# Altium PCB VALVE_MODULE_20221227OK .PcbDoc (part 1 of 4)
Units mm, origin at the board's own origin, x right, y up, seen from the top; angles counter-clockwise.
Board outline 260.15 x 142.01 mm, 2 copper layers (Top Layer, Bottom Layer); 455 components, 212 nets, 1302 pads, 385 vias.
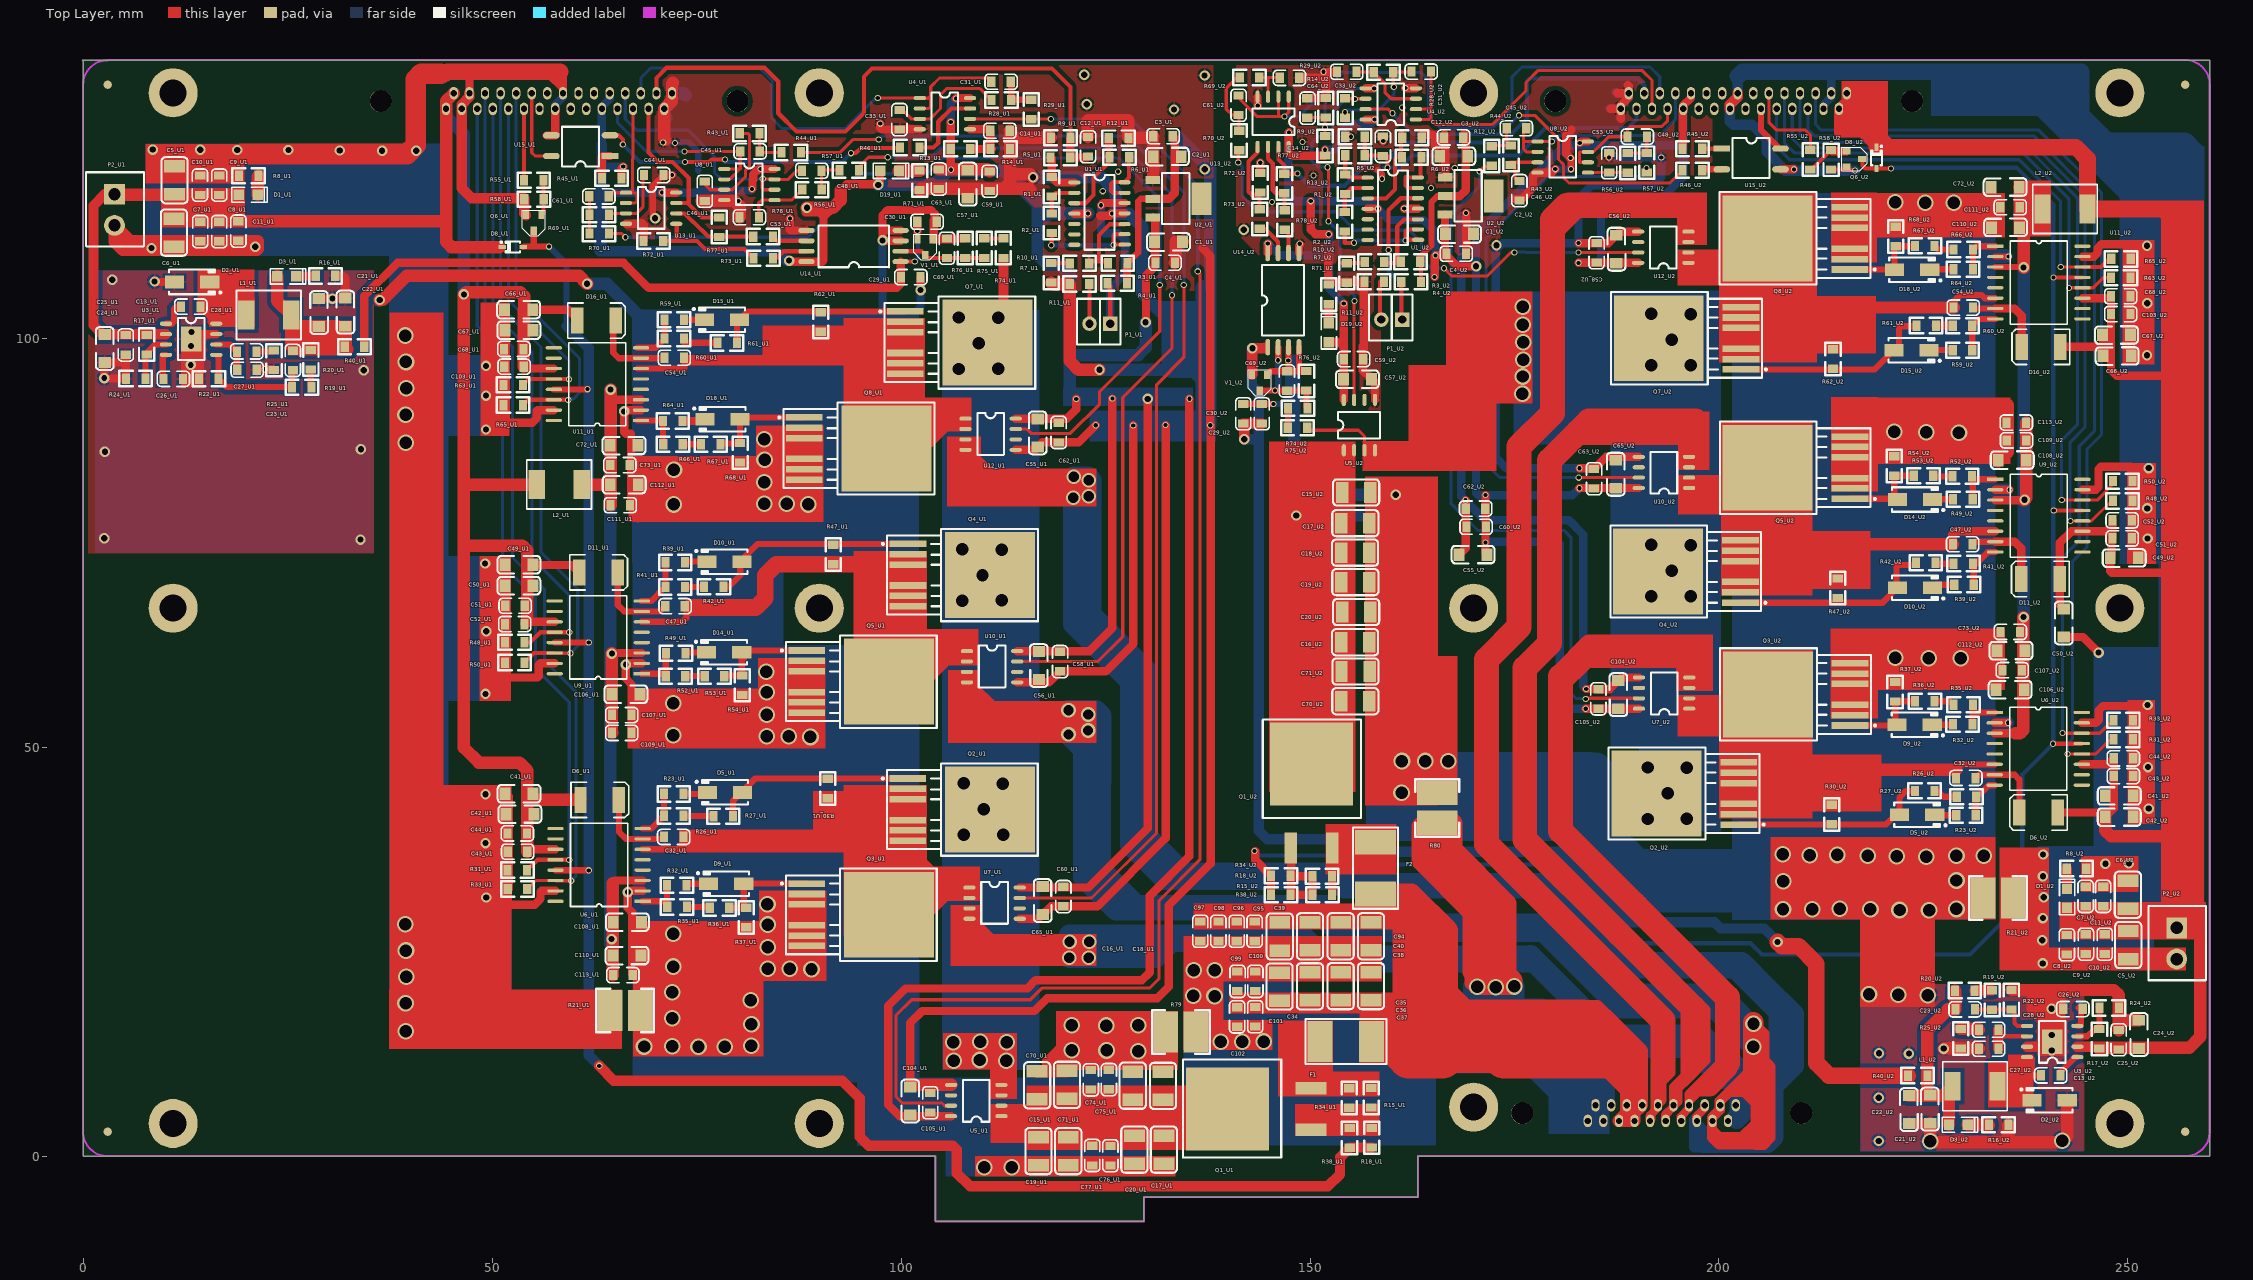
[diagram p0: Top Layer view]
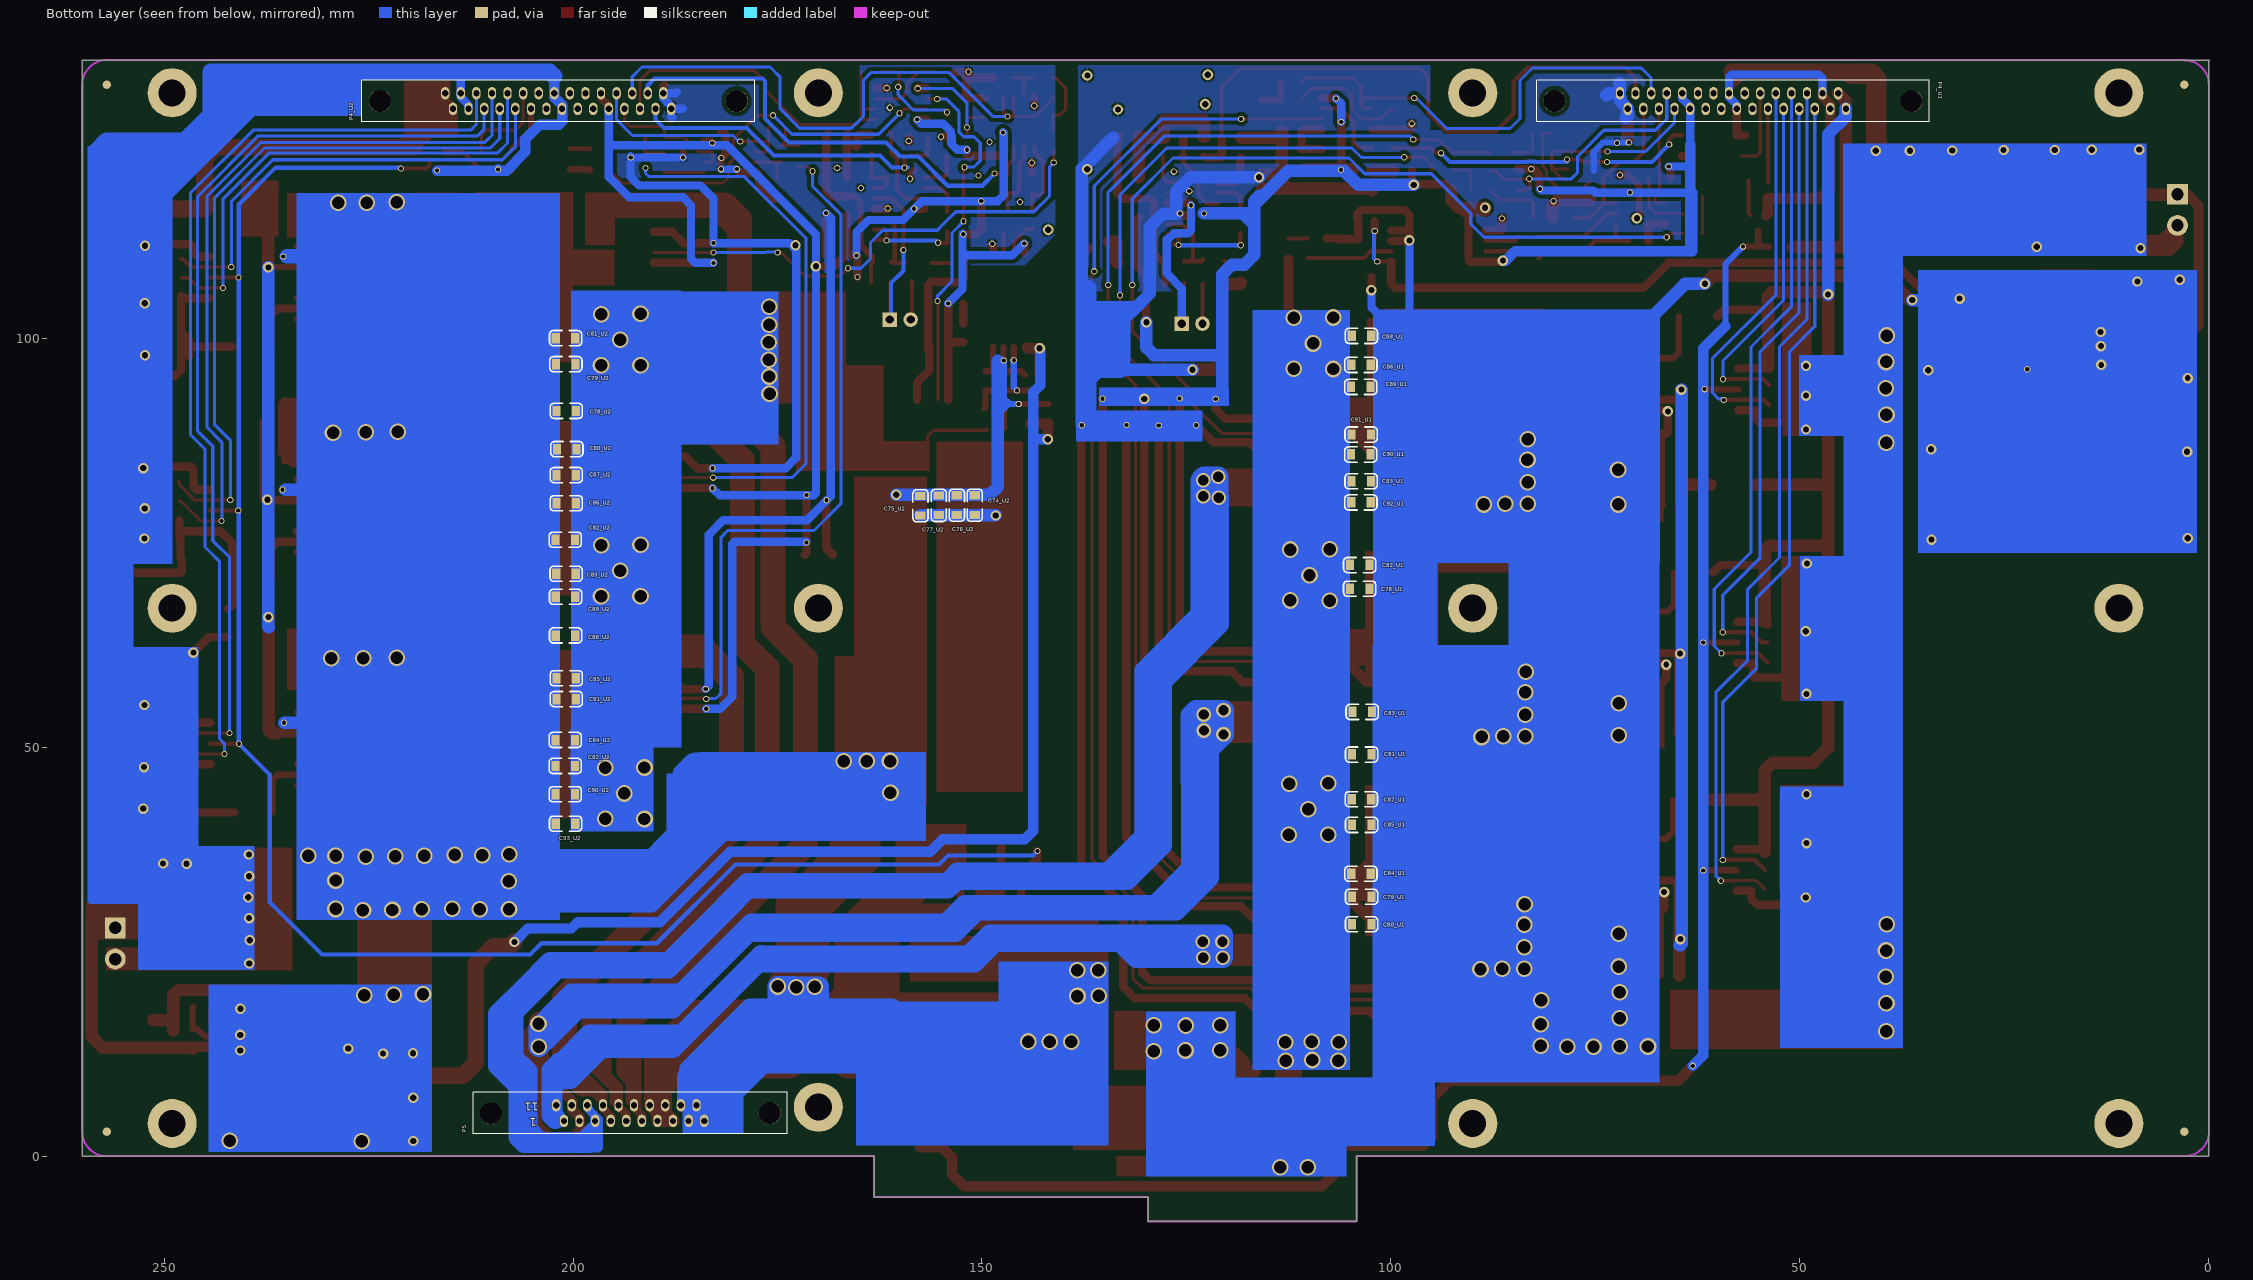
[diagram p1: Bottom Layer view, seen from below]

## Layer stack, top to bottom
Top Layer: signal copper 0.0356
Dielectric: core 0.32, FR-4, Dk 4.8
Bottom Layer: signal copper 0.0356

## Board outline
-0.025,134.01 0,133.985 0,0 104.2,0 104.2,-7.925 129.624,-7.925 129.7,-8.001 129.7,-5 163.2,-5 163.2,0 260.02,0 260.02,134.01 -0.127,134.01

## Design rules (kind name [scope] priority, off if disabled: settings)
Clearance Clearance_1 [InPolygon] p1: gap=0.508
Clearance [All] p2: gap=0.254
HoleSize [All] p1: absolutevalues=TRUE maxlimit=12.7 minlimit=0.025 maxpercent=80.000 minpercent=20.000
MinimumSolderMaskSliver [All] p1: minsoldermaskwidth=0
PolygonConnect [All] p1: connectstyle=Relief reliefconductorwidth=0.254 reliefentries=4 polygonreliefangle="90 Angle" airgapwidth=0.254
RoutingVias [All] p1: holewidth=0.711 width=1.27 viastyle="Through Hole" minholewidth=0.508 minwidth=0.762 maxholewidth=2.032 maxwidth=2.54
SilkToSilkClearance [All] p1: silktosilkclearance=0
SilkToSolderMaskClearance [IsPad] p1: minsilkscreentomaskgap=0 clearancetoexposedcopper=TRUE
SolderMaskExpansion [All] p1: expansion=0.102
Width [All] p1: maxlimit=5.08 minlimit=0.254 preferedwidth=0.254 minimp=50.000000 maximp=50.000000 favimp=50.000000
24 further rules are at their usual default settings.

## Classes and differential pairs
channel class THREE_PHASE_MODULE: U1 U2
component class U3: C34 C35 C36 C37 C38 C39 C40 C94 C95 C96 C97 C98 C99 C100 C101 C102 F1 F2 P5 R79 R80
component class U2: C1_U2 C2_U2 C3_U2 C4_U2 C5_U2 C6_U2 C7_U2 C8_U2 C9_U2 C10_U2 C11_U2 C12_U2 C13_U2 C14_U2 C15_U2 C16_U2 C17_U2 C18_U2 C19_U2 C20_U2 C21_U2 C22_U2 C23_U2 C24_U2 C25_U2 C26_U2 C27_U2 C28_U2 C29_U2 C30_U2 C31_U2 C32_U2 C33_U2 C41_U2 C42_U2 C43_U2 C44_U2 C45_U2 C46_U2 C47_U2 C48_U2 C49_U2 C50_U2 C51_U2 C52_U2 C53_U2 C54_U2 C55_U2 C56_U2 C57_U2 C58_U2 C59_U2 C60_U2 C61_U2 C62_U2 C63_U2 C64_U2 C65_U2 C66_U2 C67_U2 C68_U2 C69_U2 C70_U2 C71_U2 C72_U2 C73_U2 C74_U2 C75_U2 C76_U2 C77_U2 C78_U2 C79_U2 C80_U2 C81_U2 C82_U2 C83_U2 C84_U2 C85_U2 C86_U2 C87_U2 C88_U2 C89_U2 C90_U2 C91_U2 C92_U2 C93_U2 C103_U2 C104_U2 C105_U2 C106_U2 C107_U2 C108_U2 C109_U2 C110_U2 C111_U2 C112_U2 C113_U2 D1_U2 D2_U2 D3_U2 D5_U2 D6_U2 D8_U2 D9_U2 D10_U2 D11_U2 D14_U2 D15_U2 D16_U2 D18_U2 D19_U2 L1_U2 L2_U2 P1_U2 P2_U2 P4_U2 Q1_U2 Q2_U2 Q3_U2 Q4_U2 Q5_U2 Q6_U2 Q7_U2 Q8_U2 R1_U2 R2_U2 R3_U2 R4_U2 R5_U2 R6_U2 R7_U2 R8_U2 R9_U2 R10_U2 R11_U2 R12_U2 R13_U2 R14_U2 R15_U2 R16_U2 R17_U2 R18_U2 R19_U2 R20_U2 R21_U2 R22_U2 R23_U2 R24_U2 R25_U2 R26_U2 R27_U2 R28_U2 R29_U2 R30_U2 R31_U2 R32_U2 R33_U2 R34_U2 R35_U2 R36_U2 R37_U2 R38_U2 R39_U2 R40_U2 R41_U2 R42_U2 R43_U2 R44_U2 R45_U2 R46_U2 R47_U2 R48_U2 R49_U2 R50_U2 R52_U2 R53_U2 R54_U2 R55_U2 R56_U2 R57_U2 R58_U2 R59_U2 R60_U2 R61_U2 R62_U2 R63_U2 R64_U2 R65_U2 R66_U2 R67_U2 R68_U2 R69_U2 R70_U2 R71_U2 R72_U2 R73_U2 R74_U2 R75_U2 R76_U2 R77_U2 R78_U2 U1_U2 U2_U2 U3_U2 U4_U2 U5_U2 U6_U2 U7_U2 U8_U2 U9_U2 U10_U2 U11_U2 U12_U2 U13_U2 U14_U2 U15_U2 V1_U2
component class U1: C1_U1 C2_U1 C3_U1 C4_U1 C5_U1 C6_U1 C7_U1 C8_U1 C9_U1 C10_U1 C11_U1 C12_U1 C13_U1 C14_U1 C15_U1 C16_U1 C17_U1 C18_U1 C19_U1 C20_U1 C21_U1 C22_U1 C23_U1 C24_U1 C25_U1 C26_U1 C27_U1 C28_U1 C29_U1 C30_U1 C31_U1 C32_U1 C33_U1 C41_U1 C42_U1 C43_U1 C44_U1 C45_U1 C46_U1 C47_U1 C48_U1 C49_U1 C50_U1 C51_U1 C52_U1 C53_U1 C54_U1 C55_U1 C56_U1 C57_U1 C58_U1 C59_U1 C60_U1 C61_U1 C62_U1 C63_U1 C64_U1 C65_U1 C66_U1 C67_U1 C68_U1 C69_U1 C70_U1 C71_U1 C72_U1 C73_U1 C74_U1 C75_U1 C76_U1 C77_U1 C78_U1 C79_U1 C80_U1 C81_U1 C82_U1 C83_U1 C84_U1 C85_U1 C86_U1 C87_U1 C88_U1 C89_U1 C90_U1 C91_U1 C92_U1 C93_U1 C103_U1 C104_U1 C105_U1 C106_U1 C107_U1 C108_U1 C109_U1 C110_U1 C111_U1 C112_U1 C113_U1 D1_U1 D2_U1 D3_U1 D5_U1 D6_U1 D8_U1 D9_U1 D10_U1 D11_U1 D14_U1 D15_U1 D16_U1 D18_U1 D19_U1 L1_U1 L2_U1 P1_U1 P2_U1 P4_U1 Q1_U1 Q2_U1 Q3_U1 Q4_U1 Q5_U1 Q6_U1 Q7_U1 Q8_U1 R1_U1 R2_U1 R3_U1 R4_U1 R5_U1 R6_U1 R7_U1 R8_U1 R9_U1 R10_U1 R11_U1 R12_U1 R13_U1 R14_U1 R15_U1 R16_U1 R17_U1 R18_U1 R19_U1 R20_U1 R21_U1 R22_U1 R23_U1 R24_U1 R25_U1 R26_U1 R27_U1 R28_U1 R29_U1 R30_U1 R31_U1 R32_U1 R33_U1 R34_U1 R35_U1 R36_U1 R37_U1 R38_U1 R39_U1 R40_U1 R41_U1 R42_U1 R43_U1 R44_U1 R45_U1 R46_U1 R47_U1 R48_U1 R49_U1 R50_U1 R52_U1 R53_U1 R54_U1 R55_U1 R56_U1 R57_U1 R58_U1 R59_U1 R60_U1 R61_U1 R62_U1 R63_U1 R64_U1 R65_U1 R66_U1 R67_U1 R68_U1 R69_U1 R70_U1 R71_U1 R72_U1 R73_U1 R74_U1 R75_U1 R76_U1 R77_U1 R78_U1 U1_U1 U2_U1 U3_U1 U4_U1 U5_U1 U6_U1 U7_U1 U8_U1 U9_U1 U10_U1 U11_U1 U12_U1 U13_U1 U14_U1 U15_U1 V1_U1

## Components (designator, comment, footprint, x,y, rotation, side; value= is the part's Value field where it differs from the comment)
C1_U1 "22uF/25V" WP_1206CC 130.988,111.785 r0 top (schematic designator C1)
C1_U2 "22uF/25V" WP_1206CC 166.573,112.751 r0 top (schematic designator C1)
C2_U1 "22uF/25V" WP_1206CC 134.264,122.199 r180 top (schematic designator C2)
C2_U2 "22uF/25V" WP_1206CC 169.291,122.225 r180 top (schematic designator C2)
C3_U1 "0.1uF/50V" WP_0805C 133.248,124.663 r180 top (schematic designator C3)
C3_U2 "0.1uF/50V" WP_0805C 168.758,124.511 r180 top (schematic designator C3)
C4_U1 "0.1uF/50V" WP_0805C 131.064,109.271 r0 top (schematic designator C4)
C4_U2 "0.1uF/50V" WP_0805C 166.675,110.363 r0 top (schematic designator C4)
C5_U1 "47uF/50V" WP_1210CC 11.176,117.602 r90 top (schematic designator C5)
C5_U2 "47uF/50V" WP_1210CC 250.038,27.534 r270 top (schematic designator C5)
C6_U1 "47uF/50V" WP_1210CC 11.1,114.63 r270 top (schematic designator C6)
C6_U2 "47uF/50V" WP_1210CC 249.987,30.251 r90 top (schematic designator C6)
C7_U1 "0.1uF/50V" WP_0805C 14.275,111.836 r90 top (schematic designator C7)
C7_U2 "0.1uF/50V" WP_0805C 244.856,32.969 r270 top (schematic designator C7)
C8_U1 "0.1uF/50V" WP_0805C 16.612,111.836 r90 top (schematic designator C8)
C8_U2 "0.1uF/50V" WP_0805C 242.494,24.638 r90 top (schematic designator C8)
C9_U1 "0.1uF/50V" WP_0805C 16.688,119.939 r270 top (schematic designator C9)
C9_U2 "0.1uF/50V" WP_0805C 244.831,24.714 r90 top (schematic designator C9)
C10_U1 "0.1uF/50V" WP_0805C 14.326,119.939 r270 top (schematic designator C10)
C10_U2 "0.1uF/50V" WP_0805C 247.117,24.714 r90 top (schematic designator C10)
C11_U1 "0.1uF/50V" WP_0805C 18.948,111.887 r90 top (schematic designator C11)
C11_U2 "0.1uF/50V" WP_0805C 246.99,32.969 r270 top (schematic designator C11)
C12_U1 "0.1uF/50V" WP_0805C 122.834,122.199 r90 top (schematic designator C12)
C12_U2 "0.1uF/50V" WP_0805C 158.877,122.25 r90 top (schematic designator C12)
C13_U1 "0.1uF/50V" WP_0805C 14.376,103.835 r180 top (schematic designator C13)
C13_U2 "0.1uF/50V" WP_0805C 239.344,9.906 r0 top (schematic designator C13)
C14_U1 "0.1uF/50V" WP_0805C 110.871,125.4 r0 top (schematic designator C14)
C14_U2 "0.1uF/50V" WP_0805C 149.657,126.924 r90 top (schematic designator C14)
C15_U1 "47uF/100V" WP_1210CC 120.294,7.01 r90 top (schematic designator C15)
C15_U2 "47uF/100V" WP_1210CC 153.924,81.153 r0 top (schematic designator C15)
C16_U1 "47uF/100V" WP_1210CC 128.321,6.909 r90 top (schematic designator C16)
C16_U2 "47uF/100V" WP_1210CC 153.797,62.84 r0 top (schematic designator C16)
C17_U1 "47uF/100V" WP_1210CC 132.131,2.515 r270 top (schematic designator C17)
C17_U2 "47uF/100V" WP_1210CC 153.822,77.394 r0 top (schematic designator C17)
C18_U1 "47uF/100V" WP_1210CC 132.029,6.883 r90 top (schematic designator C18)
C18_U2 "47uF/100V" WP_1210CC 153.797,73.787 r0 top (schematic designator C18)
C19_U1 "47uF/100V" WP_1210CC 116.789,2.337 r270 top (schematic designator C19)
C19_U2 "47uF/100V" WP_1210CC 153.822,70.18 r0 top (schematic designator C19)
C20_U1 "47uF/100V" WP_1210CC 128.524,2.515 r270 top (schematic designator C20)
C20_U2 "47uF/100V" WP_1210CC 153.924,66.523 r0 top (schematic designator C20)
C21_U1 "22uF/25V" WP_1206CC 28.829,101.422 r90 top (schematic designator C21)
C21_U2 "22uF/25V" WP_1206CC 225.806,7.468 r270 top (schematic designator C21)
C22_U1 "22uF/25V" WP_1206CC 32.055,101.473 r90 top (schematic designator C22)
C22_U2 "22uF/25V" WP_1206CC 223.241,7.417 r270 top (schematic designator C22)
C23_U1 "100pF/50V" WP_0805C 25.679,98.501 r270 top (schematic designator C23)
C23_U2 "100pF/50V" WP_0805C 228.879,17.983 r0 top (schematic designator C23)
C24_U1 "22uF/25V" WP_1206CC 2.667,100.457 r270 top (schematic designator C24)
C24_U2 "22uF/25V" WP_1206CC 251.333,13.183 r90 top (schematic designator C24)
C25_U1 "0.1uF/50V" WP_0805C 5.182,97.968 r90 top (schematic designator C25)
C25_U2 "0.1uF/50V" WP_0805C 248.895,15.443 r270 top (schematic designator C25)
C26_U1 "0.01uF/50V" WP_0805C 12.243,94.996 r180 top (schematic designator C26)
C26_U2 "0.01uF/50V" WP_0805C 242.062,18.034 r0 top (schematic designator C26)
C27_U1 "22pF/50V" WP_0805C 21.26,96.114 r180 top (schematic designator C27)
C27_U2 "22pF/50V" WP_0805C 231.75,13.183 r0 top (schematic designator C27)
C28_U1 "2.2nF/50V" WP_0805C 21.209,98.349 r180 top (schematic designator C28)
C28_U2 "2.2nF/50V" WP_0805C 231.75,15.494 r0 top (schematic designator C28)
C29_U1 "0.1uF/50V" WP_0805C 102.413,107.442 r180 top (schematic designator C29)
C29_U2 "0.1uF/50V" WP_0805C 144.145,91.973 r270 top (schematic designator C29)
C30_U1 "0.1uF/50V" WP_0805C 104.394,114.198 r180 top (schematic designator C30)
C30_U2 "0.1uF/50V" WP_0805C 141.884,91.973 r270 top (schematic designator C30)
C31_U1 "10nF/50V" WP_0805C 113.436,131.318 r180 top (schematic designator C31)
C31_U2 "10nF/50V" WP_0805C 162.382,132.639 r0 top (schematic designator C31)
C32_U1 "1uF/50V" WP_0805C 70.993,39.065 r0 top (schematic designator C32)
C32_U2 "1uF/50V" WP_0805C 231.394,46.203 r180 top (schematic designator C32)
C33_U1 "3.3nF/50V" WP_0805C 99.847,127.94 r270 top (schematic designator C33)
C33_U2 "3.3nF/50V" WP_0805C 155.702,132.537 r180 top (schematic designator C33)
C34 "47uF/100V" WP_1210CC 146.279,19.025 r90 top
C35 "47uF/100V" WP_1210CC 149.987,19.05 r90 top
C36 "47uF/100V" WP_1210CC 157.455,19.075 r90 top
C37 "47uF/100V" WP_1210CC 153.746,19.075 r90 top
C38 "47uF/100V" WP_1210CC 149.987,28.6 r270 top
C39 "47uF/100V" WP_1210CC 146.304,28.575 r270 top
C40 "47uF/100V" WP_1210CC 153.746,28.6 r270 top
C41_U1 "10uF/50V" WP_1206CC 55.016,44.298 r180 top (schematic designator C41)
C41_U2 "10uF/50V" WP_1206CC 247.218,44.069 r0 top (schematic designator C41)
C42_U1 "10uF/50V" WP_1206CC 55.118,41.808 r180 top (schematic designator C42)
C42_U2 "10uF/50V" WP_1206CC 247.218,41.478 r0 top (schematic designator C42)
C43_U1 "0.1uF/50V" WP_0805C 54.331,37.186 r180 top (schematic designator C43)
C43_U2 "0.1uF/50V" WP_0805C 248.234,46.507 r0 top (schematic designator C43)
C44_U1 "0.1uF/50V" WP_0805C 54.305,39.421 r180 top (schematic designator C44)
C44_U2 "0.1uF/50V" WP_0805C 248.234,48.666 r0 top (schematic designator C44)
C45_U1 "10nF/50V" WP_0805C 82.753,122.809 r180 top (schematic designator C45)
C45_U2 "10nF/50V" WP_0805C 174.015,125.705 r0 top (schematic designator C45)
C46_U1 "3.3nF/50V" WP_0805C 76.048,119.177 r270 top (schematic designator C46)
C46_U2 "3.3nF/50V" WP_0805C 175.641,119.253 r270 top (schematic designator C46)
C47_U1 "Cap Semi" WP_0805C 73.584,67.208 r180 top (schematic designator C47)
C47_U2 "Cap Semi" WP_0805C 228.575,74.854 r0 top (schematic designator C47)
C48_U1 "10nF/50V" WP_0805C 90.297,120.447 r180 top (schematic designator C48)
C48_U2 "10nF/50V" WP_0805C 191.237,124.612 r180 top (schematic designator C48)
C49_U1 "10uF/50V" WP_1206CC 54.991,72.288 r180 top (schematic designator C49)
C49_U2 "10uF/50V" WP_1206CC 247.828,73.152 r0 top (schematic designator C49)
C50_U1 "10uF/50V" WP_1206CC 54.991,69.723 r180 top (schematic designator C50)
C50_U2 "10uF/50V" WP_1206CC 242.164,66.904 r270 top (schematic designator C50)
C51_U1 "0.1uF/50V" WP_0805C 54.026,67.259 r180 top (schematic designator C51)
C51_U2 "0.1uF/50V" WP_0805C 248.082,75.565 r0 top (schematic designator C51)
C52_U1 "0.1uF/50V" WP_0805C 53.975,65.024 r180 top (schematic designator C52)
C52_U2 "0.1uF/50V" WP_0805C 248.082,77.775 r0 top (schematic designator C52)
C53_U1 "3.3nF/50V" WP_0805C 82.677,114.757 r180 top (schematic designator C53)
C53_U2 "3.3nF/50V" WP_0805C 186.538,120.244 r90 top (schematic designator C53)
C54_U1 "Cap Semi" WP_0805C 73.482,97.587 r180 top (schematic designator C54)
C54_U2 "Cap Semi" WP_0805C 228.651,103.784 r0 top (schematic designator C54)
C55_U1 "22uF/25V" WP_1206CC 116.713,90.145 r270 top (schematic designator C55)
C55_U2 "22uF/25V" WP_1206CC 171.653,73.533 r180 top (schematic designator C55)
C56_U1 "22uF/25V" WP_1206CC 116.865,61.697 r270 top (schematic designator C56)
C56_U2 "22uF/25V" WP_1206CC 187.452,109.169 r90 top (schematic designator C56)
C57_U1 "22uF/25V" WP_1206CC 108.179,120.548 r270 top (schematic designator C57)
C57_U2 "22uF/25V" WP_1206CC 154.076,94.996 r0 top (schematic designator C57)
C58_U1 "0.1uF/50V" WP_0805C 119.405,59.258 r90 top (schematic designator C58)
C58_U2 "0.1uF/50V" WP_0805C 185.064,111.658 r270 top (schematic designator C58)
C59_U1 "0.1uF/50V" WP_0805C 110.795,117.983 r90 top (schematic designator C59)
C59_U2 "0.1uF/50V" WP_0805C 156.54,97.409 r180 top (schematic designator C59)
C60_U1 "0.1uF/50V" WP_0805C 119.812,30.531 r90 top (schematic designator C60)
C60_U2 "0.1uF/50V" WP_0805C 169.088,76.987 r0 top (schematic designator C60)
C61_U1 "10nF/50V" WP_0805C 61.849,117.373 r0 top (schematic designator C61)
C61_U2 "10nF/50V" WP_0805C 141.224,127.279 r90 top (schematic designator C61)
C62_U1 "1uF/50V" WP_0805C 119.304,89.687 r270 top (schematic designator C62)
C62_U2 "1uF/50V" WP_0805C 171.45,79.146 r180 top (schematic designator C62)
C63_U1 "0.1uF/50V" WP_0805C 104.648,120.675 r270 top (schematic designator C63)
C63_U2 "0.1uF/50V" WP_0805C 184.683,81.61 r90 top (schematic designator C63)
C64_U1 "3.3nF/50V" WP_0805C 68.555,119.99 r0 top (schematic designator C64)
C64_U2 "3.3nF/50V" WP_0805C 146.279,131.877 r0 top (schematic designator C64)
C65_U1 "22uF/25V" WP_1206CC 117.323,32.969 r270 top (schematic designator C65)
C65_U2 "22uF/25V" WP_1206CC 187.35,81.661 r90 top (schematic designator C65)
C66_U1 "10uF/50V" WP_1206CC 54.966,103.48 r180 top (schematic designator C66)
C66_U2 "10uF/50V" WP_1206CC 246.964,97.841 r0 top (schematic designator C66)
C67_U1 "10uF/50V" WP_1206CC 54.991,100.965 r180 top (schematic designator C67)
C67_U2 "10uF/50V" WP_1206CC 246.888,100.406 r0 top (schematic designator C67)
C68_U1 "0.1uF/50V" WP_0805C 53.873,98.654 r180 top (schematic designator C68)
C68_U2 "0.1uF/50V" WP_0805C 247.904,105.181 r0 top (schematic designator C68)
C69_U1 "1nF/50V" WP_0805C 105.639,112.217 r270 top (schematic designator C69)
C69_U2 "1nF/50V" WP_0805C 147.218,95.987 r270 top (schematic designator C69)
C70_U1 "47uF/100V" WP_1210CC 116.637,6.96 r90 top (schematic designator C70)
C70_U2 "47uF/100V" WP_1210CC 153.822,55.626 r0 top (schematic designator C70)
C71_U1 "47uF/100V" WP_1210CC 120.447,2.337 r270 top (schematic designator C71)
C71_U2 "47uF/100V" WP_1210CC 153.848,59.258 r0 top (schematic designator C71)
C72_U1 "10uF/50V" WP_1206CC 64.414,86.893 r0 top (schematic designator C72)
C72_U2 "10uF/50V" WP_1206CC 236.703,118.466 r180 top (schematic designator C72)
C73_U1 "0.1uF/50V" WP_0805C 64.414,84.531 r0 top (schematic designator C73)
C73_U2 "0.1uF/50V" WP_0805C 236.83,64.059 r180 top (schematic designator C73)
C74_U1 "0.1uF/50V" WP_0805C 123.165,8.128 r90 top (schematic designator C74)
C74_U2 "0.1uF/50V" WP_0805C 150.927,78.384 r90 bottom (schematic designator C74)
C75_U1 "0.1uF/50V" WP_0805C 125.374,8.153 r90 top (schematic designator C75)
C75_U2 "0.1uF/50V" WP_0805C 157.556,78.308 r90 bottom (schematic designator C75)
C76_U1 "0.1uF/50V" WP_0805C 125.628,1.27 r270 top (schematic designator C76)
C76_U2 "0.1uF/50V" WP_0805C 153.111,78.384 r90 bottom (schematic designator C76)
C77_U1 "0.1uF/50V" WP_0805C 123.419,1.295 r270 top (schematic designator C77)
C77_U2 "0.1uF/50V" WP_0805C 155.321,78.359 r90 bottom (schematic designator C77)
C78_U1 "0.1uF/50V" WP_0805C 105.029,69.418 r180 bottom (schematic designator C78)
C78_U2 "0.1uF/50V" WP_0805C 199.619,91.084 r0 bottom (schematic designator C78)
C79_U1 "0.1uF/50V" WP_0805C 104.8,31.75 r180 bottom (schematic designator C79)
C79_U2 "0.1uF/50V" WP_0805C 199.669,96.799 r0 bottom (schematic designator C79)
C80_U1 "0.1uF/50V" WP_0805C 104.8,28.397 r180 bottom (schematic designator C80)
C80_U2 "0.1uF/50V" WP_0805C 199.542,86.411 r0 bottom (schematic designator C80)
C81_U1 "0.1uF/50V" WP_0805C 104.8,49.149 r180 bottom (schematic designator C81)
C81_U2 "0.1uF/50V" WP_0805C 199.695,99.974 r0 bottom (schematic designator C81)
C82_U1 "0.1uF/50V" WP_0805C 105.029,72.314 r180 bottom (schematic designator C82)
C82_U2 "0.1uF/50V" WP_0805C 199.746,75.336 r0 bottom (schematic designator C82)
C83_U1 "0.1uF/50V" WP_0805C 104.724,54.356 r180 bottom (schematic designator C83)
C83_U2 "0.1uF/50V" WP_0805C 199.644,71.171 r0 bottom (schematic designator C83)
C84_U1 "0.1uF/50V" WP_0805C 104.877,34.569 r180 bottom (schematic designator C84)
C84_U2 "0.1uF/50V" WP_0805C 199.746,50.851 r0 bottom (schematic designator C84)
C85_U1 "0.1uF/50V" WP_0805C 104.8,40.538 r180 bottom (schematic designator C85)
C85_U2 "0.1uF/50V" WP_0805C 199.619,58.395 r0 bottom (schematic designator C85)
C86_U1 "0.1uF/50V" WP_0805C 104.877,96.774 r180 bottom (schematic designator C86)
C86_U2 "0.1uF/50V" WP_0805C 199.619,79.781 r0 bottom (schematic designator C86)
C87_U1 "0.1uF/50V" WP_0805C 104.826,43.688 r180 bottom (schematic designator C87)
C87_U2 "0.1uF/50V" WP_0805C 199.619,83.236 r0 bottom (schematic designator C87)
C88_U1 "0.1uF/50V" WP_0805C 104.826,100.33 r180 bottom (schematic designator C88)
C88_U2 "0.1uF/50V" WP_0805C 199.695,63.627 r0 bottom (schematic designator C88)
C89_U1 "0.1uF/50V" WP_0805C 104.902,94.082 r180 bottom (schematic designator C89)
C89_U2 "0.1uF/50V" WP_0805C 199.695,68.351 r0 bottom (schematic designator C89)
C90_U1 "0.1uF/50V" WP_0805C 104.902,85.827 r180 bottom (schematic designator C90)
C90_U2 "0.1uF/50V" WP_0805C 199.746,44.221 r0 bottom (schematic designator C90)
C91_U1 "0.1uF/50V" WP_0805C 104.851,88.265 r180 bottom (schematic designator C91)
C91_U2 "0.1uF/50V" WP_0805C 199.619,55.855 r0 bottom (schematic designator C91)
C92_U1 "0.1uF/50V" WP_0805C 104.877,79.959 r180 bottom (schematic designator C92)
C92_U2 "0.1uF/50V" WP_0805C 199.746,47.676 r0 bottom (schematic designator C92)
C93_U1 "0.1uF/50V" WP_0805C 104.851,82.55 r180 bottom (schematic designator C93)
C93_U2 "0.1uF/50V" WP_0805C 199.695,40.615 r0 bottom (schematic designator C93)
C94 "47uF/100V" WP_1210CC 157.455,28.6 r270 top
C95 "0.1uF/50V" WP_0805C 143.256,28.702 r270 top
C96 "0.1uF/50V" WP_0805C 141.072,28.702 r270 top
C97 "0.1uF/50V" WP_0805C 136.627,28.702 r270 top
C98 "0.1uF/50V" WP_0805C 138.836,28.702 r270 top
C99 "0.1uF/50V" WP_0805C 141.097,20.168 r90 top
C100 "0.1uF/50V" WP_0805C 143.281,20.168 r90 top
C101 "0.1uF/50V" WP_0805C 143.332,18.263 r270 top
C102 "0.1uF/50V" WP_0805C 141.122,18.237 r270 top
C103_U1 "0.1uF/50V" WP_0805C 53.899,96.495 r180 top (schematic designator C103)
C103_U2 "0.1uF/50V" WP_0805C 247.904,102.997 r0 top (schematic designator C103)
C104_U1 "22uF/25V" WP_1206CC 101.117,5.029 r90 top (schematic designator C104)
C104_U2 "22uF/25V" WP_1206CC 187.681,54.712 r90 top (schematic designator C104)
C105_U1 "0.1uF/50V" WP_0805C 103.607,7.747 r270 top (schematic designator C105)
C105_U2 "0.1uF/50V" WP_0805C 185.293,57.125 r270 top (schematic designator C105)
C106_U1 "10uF/50V" WP_1206CC 64.643,56.49 r0 top (schematic designator C106)
C106_U2 "10uF/50V" WP_1206CC 237.312,57.023 r180 top (schematic designator C106)
C107_U1 "0.1uF/50V" WP_0805C 64.643,53.975 r0 top (schematic designator C107)
C107_U2 "0.1uF/50V" WP_0805C 237.058,59.385 r180 top (schematic designator C107)
C108_U1 "10uF/50V" WP_1206CC 64.821,28.626 r0 top (schematic designator C108)
C108_U2 "10uF/50V" WP_1206CC 237.566,85.09 r180 top (schematic designator C108)
C109_U1 "0.1uF/50V" WP_0805C 64.643,51.791 r0 top (schematic designator C109)
C109_U2 "0.1uF/50V" WP_0805C 237.592,87.478 r180 top (schematic designator C109)
C110_U1 "10uF/50V" WP_1206CC 64.77,24.536 r0 top (schematic designator C110)
C110_U2 "10uF/50V" WP_1206CC 236.753,113.538 r180 top (schematic designator C110)
C111_U1 "0.1uF/50V" WP_0805C 64.465,79.629 r0 top (schematic designator C111)
C111_U2 "0.1uF/50V" WP_0805C 236.804,115.976 r180 top (schematic designator C111)
C112_U1 "10uF/50V" WP_1206CC 64.44,82.118 r0 top (schematic designator C112)
C112_U2 "10uF/50V" WP_1206CC 237.414,61.798 r180 top (schematic designator C112)
C113_U1 "0.1uF/50V" WP_0805C 64.795,22.174 r0 top (schematic designator C113)
C113_U2 "0.1uF/50V" WP_0805C 237.566,89.662 r180 top (schematic designator C113)
D1_U1 "" WP_0805_LED 19.025,117.551 r0 top (schematic designator D1)
D1_U2 "" WP_0805_LED 242.545,30.353 r90 top (schematic designator D1)
D2_U1 "1N5822" WP_SMA_DO214AC 11.176,106.883 r0 top (schematic designator D2)
D2_U2 "1N5822" WP_SMA_DO214AC 242.57,6.858 r180 top (schematic designator D2)
D3_U1 "LED" WP_0805_LED 23.724,107.569 r0 top (schematic designator D3)
D3_U2 "LED" WP_0805_LED 228.117,3.861 r0 top (schematic designator D3)
D5_U1 "1N5822" WP_SMA_DO214AC 80.62,44.475 r180 top (schematic designator D5)
D5_U2 "1N5822" WP_SMA_DO214AC 222.072,41.758 r0 top (schematic designator D5)
D6_U1 "STTH112U" WP_1812D 60.808,43.561 r0 top (schematic designator D6)
D6_U2 "STTH112U" WP_1812D 241.427,42.012 r180 top (schematic designator D6)
D8_U1 "1N5819" WP_SOD-323 53.797,111.176 r180 top (schematic designator D8)
D8_U2 "1N5819" WP_SOD-323 219.304,120.777 r90 top (schematic designator D8)
D9_U1 "1N5822" WP_SMA_DO214AC 80.772,33.299 r180 top (schematic designator D9)
D9_U2 "1N5822" WP_SMA_DO214AC 221.767,52.756 r0 top (schematic designator D9)
D10_U1 "1N5822" WP_SMA_DO214AC 80.569,72.695 r180 top (schematic designator D10)
D10_U2 "1N5822" WP_SMA_DO214AC 221.818,69.494 r0 top (schematic designator D10)
D11_U1 "STTH112U" WP_1812D 60.655,71.374 r0 top (schematic designator D11)
D11_U2 "STTH112U" WP_1812D 241.656,70.561 r180 top (schematic designator D11)
D14_U1 "1N5822" WP_SMA_DO214AC 80.518,61.595 r180 top (schematic designator D14)
D14_U2 "1N5822" WP_SMA_DO214AC 221.818,80.289 r0 top (schematic designator D14)
D15_U1 "1N5822" WP_SMA_DO214AC 80.264,102.26 r180 top (schematic designator D15)
D15_U2 "1N5822" WP_SMA_DO214AC 221.386,98.552 r0 top (schematic designator D15)
D16_U1 "STTH112U" WP_1812D 60.401,102.159 r0 top (schematic designator D16)
D16_U2 "STTH112U" WP_1812D 241.706,98.958 r180 top (schematic designator D16)
D18_U1 "1N5822" WP_SMA_DO214AC 80.315,90.094 r180 top (schematic designator D18)
D18_U2 "1N5822" WP_SMA_DO214AC 221.463,108.382 r0 top (schematic designator D18)
D19_U1 "LED" WP_0805_LED 97.434,120.472 r0 top (schematic designator D19)
D19_U2 "LED" WP_0805_LED 152.298,99.517 r90 top (schematic designator D19)
F1 "SMD2920R700SF" WP_2420 157.531,14.021 r180 top
F2 "SMD2920R700SF" WP_2420 157.988,32.08 r90 top
L1_U1 "10uH/2A" WP_LBS6*6 25.451,102.845 r180 top (schematic designator L1)
L1_U2 "10uH/2A" WP_LBS6*6 228.549,8.56 r0 top (schematic designator L1)
L2_U1 "10uH/2A" WP_LBS6*6 60.96,82.118 r180 top (schematic designator L2)
L2_U2 "10uH/2A" WP_LBS6*6 239.547,115.799 r0 top (schematic designator L2)
P1_U1 "Header 2" WP_SIP2 125.578,101.778 r180 top (schematic designator P1)
P1_U2 "Header 2" WP_SIP2 161.265,102.286 r180 top (schematic designator P1)
P2_U1 "Header 2" WP_LSIP2 3.835,117.602 r270 top (schematic designator P2)
P2_U2 "Header 2" WP_LSIP2 255.956,27.915 r270 top (schematic designator P2)
P4_U1 "Header 15X2A" WP_CRM222-030 44.374,128.047 r180 bottom locked (schematic designator P4)
P4_U2 "Header 15X2A" WP_CRM222-030 215.623,129.952 r0 bottom locked (schematic designator P4)
P5 "Header 10X2A" WP_CRM222-020 202.057,6.223 r0 bottom
Q1_U1 "IPB110P06LM" WP_TO263-3 150.139,3.226 r90 top (schematic designator Q7)
Q1_U2 "IPB110P06LM" WP_TO263-3 147.625,37.694 r0 top (schematic designator Q7)
Q2_U1 "IPB017N10N5L" JY_TO263-7 100.813,46.177 r270 top (schematic designator Q7)
Q2_U2 "IPB017N10N5L" JY_TO263-7 202.413,40.538 r90 top (schematic designator Q7)
Q3_U1 "IPB017N10N5L" JY_TO263-7 88.468,33.325 r270 top (schematic designator Q7)
Q3_U2 "IPB017N10N5L" JY_TO263-7 216.027,52.654 r90 top (schematic designator Q7)
Q4_U1 "IPB017N10N5L" JY_TO263-7 100.838,74.854 r270 top (schematic designator Q7)
Q4_U2 "IPB017N10N5L" JY_TO263-7 202.616,67.666 r90 top (schematic designator Q7)
Q5_U1 "IPB017N10N5L" JY_TO263-7 88.468,61.824 r270 top (schematic designator Q7)
Q5_U2 "IPB017N10N5L" JY_TO263-7 216.002,80.366 r90 top (schematic designator Q7)
Q6_U1 "MMBT4401" WP_SOT23B 56.032,115.062 r180 top (schematic designator Q6)
Q6_U2 "MMBT4401" WP_SOT23B 215.595,122.86 r270 top (schematic designator Q6)
Q7_U1 "IPB017N10N5L" JY_TO263-7 100.508,103.276 r270 top (schematic designator Q7)
Q7_U2 "IPB017N10N5L" JY_TO263-7 202.692,96.19 r90 top (schematic designator Q7)
Q8_U1 "IPB017N10N5L" JY_TO263-7 88.163,90.322 r270 top (schematic designator Q7)
Q8_U2 "IPB017N10N5L" JY_TO263-7 215.976,108.407 r90 top (schematic designator Q7)
R1_U1 "10K/0.1%" WP_0805R 118.415,119.71 r270 top (schematic designator R1)
R1_U2 "10K/0.1%" WP_0805R 154.305,120.015 r270 top (schematic designator R1)
R2_U1 "1K/0.1%" WP_0805R 118.415,115.265 r270 top (schematic designator R2)
R2_U2 "1K/0.1%" WP_0805R 154.254,115.443 r270 top (schematic designator R2)
R3_U1 "3K/0.1%" WP_0805R 127.686,109.169 r180 top (schematic designator R3)
R3_U2 "3K/0.1%" WP_0805R 163.474,109.347 r180 top (schematic designator R3)
R4_U1 "3K/0.1%" WP_0805R 127.635,106.731 r180 top (schematic designator R4)
R4_U2 "3K/0.1%" WP_0805R 163.551,106.883 r180 top (schematic designator R4)
R5_U1 "1K/0.1%" WP_0805R 118.288,122.098 r0 top (schematic designator R5)
R5_U2 "1K/0.1%" WP_0805R 154.305,122.352 r0 top (schematic designator R5)
R6_U1 "1K/0.1%" WP_0805R 125.501,122.123 r0 top (schematic designator R6)
R6_U2 "1K/0.1%" WP_0805R 161.239,122.149 r0 top (schematic designator R6)
R7_U1 "620R/0.1%" WP_0805R 123.012,109.144 r180 top (schematic designator R7)
R7_U2 "620R/0.1%" WP_0805R 159.08,109.322 r180 top (schematic designator R7)
R8_U1 "10K" WP_0805R 19.05,119.863 r0 top (schematic designator R8)
R8_U2 "10K" WP_0805R 244.907,35.154 r180 top (schematic designator R8)
R9_U1 "2K/0.1%" WP_0805R 118.313,124.511 r0 top (schematic designator R9)
R9_U2 "2K/0.1%" WP_0805R 154.305,124.638 r0 top (schematic designator R9)
R10_U1 "100R/0.1%" WP_0805R 118.364,106.807 r90 top (schematic designator R10)
R10_U2 "100R/0.1%" WP_0805R 154.483,106.782 r90 top (schematic designator R10)
R11_U1 "0R" WP_0805R 123.012,106.629 r180 top (schematic designator R11)
R11_U2 "0R" WP_0805R 159.029,106.909 r180 top (schematic designator R11)
R12_U1 "10K/0.1%" WP_0805R 125.4,124.485 r0 top (schematic designator R12)
R12_U2 "10K/0.1%" WP_0805R 161.265,124.536 r0 top (schematic designator R12)
R13_U1 "2K" WP_0805R 108.458,123.139 r180 top (schematic designator R13)
R13_U2 "2K" WP_0805R 151.841,124.714 r270 top (schematic designator R13)
R14_U1 "10K" WP_0805R 113.335,123.139 r180 top (schematic designator R14)
R14_U2 "10K" WP_0805R 151.917,129.362 r270 top (schematic designator R14)
R15_U1 "10K" WP_0805R 157.48,8.331 r270 top (schematic designator R15)
R15_U2 "10K" WP_0805R 152.705,31.953 r180 top (schematic designator R15)
R16_U1 "3K" WP_0805R 28.448,107.62 r0 top (schematic designator R16)
R16_U2 "3K" WP_0805R 232.994,3.861 r0 top (schematic designator R16)
R17_U1 "30K" WP_0805R 7.772,100.406 r270 top (schematic designator R17)
R17_U2 "30K" WP_0805R 246.507,13.157 r90 top (schematic designator R17)
R18_U1 "20K" WP_0805R 157.556,3.454 r270 top (schematic designator R18)
R18_U2 "20K" WP_0805R 147.625,34.265 r180 top (schematic designator R18)
R19_U1 "51K" WP_0805R 25.552,94.031 r0 top (schematic designator R19)
R19_U2 "51K" WP_0805R 233.375,17.907 r90 top (schematic designator R19)
R20_U1 "2K" WP_0805R 27.838,96.19 r90 top (schematic designator R20)
R20_U2 "2K" WP_0805R 231.242,20.244 r180 top (schematic designator R20)
R21_U1 "0R" WP_JS2L 64.516,17.831 r0 top (schematic designator R21)
R21_U2 "0R" WP_JS2L 235.864,31.547 r180 top (schematic designator R21)
R22_U1 "10K" WP_0805R 14.173,95.047 r0 top (schematic designator R22)
R22_U2 "10K" WP_0805R 235.763,20.32 r270 top (schematic designator R22)
R23_U1 "2R" WP_0805R 71.018,44.298 r0 top (schematic designator R23)
R23_U2 "2R" WP_0805R 231.394,41.681 r180 top (schematic designator R23)
R24_U1 "100K" WP_0805R 7.62,95.072 r180 top (schematic designator R24)
R24_U2 "100K" WP_0805R 246.507,18.136 r0 top (schematic designator R24)
R25_U1 "36K" WP_0805R 23.317,96.114 r90 top (schematic designator R25)
R25_U2 "36K" WP_0805R 229.54,13.183 r90 top (schematic designator R25)
R26_U1 "2R" WP_0805R 71.018,41.605 r0 top (schematic designator R26)
R26_U2 "2R" WP_0805R 231.445,43.942 r180 top (schematic designator R26)
R27_U1 "2R" WP_0805R 77.064,41.58 r0 top (schematic designator R27)
R27_U2 "2R" WP_0805R 226.339,44.653 r180 top (schematic designator R27)
R28_U1 "10K" WP_0805R 111.074,129.134 r0 top (schematic designator R28)
R28_U2 "10K" WP_0805R 157.785,132.537 r0 top (schematic designator R28)
R29_U1 "5K1" WP_0805R 115.926,129.159 r270 top (schematic designator R29)
R29_U2 "5K1" WP_0805R 154.28,126.949 r90 top (schematic designator R29)
R30_U1 "10K" WP_0805R 91.034,46.152 r270 top (schematic designator R30)
R30_U2 "10K" WP_0805R 213.792,40.589 r90 top (schematic designator R30)
R31_U1 "3K" WP_0805R 54.28,34.976 r180 top (schematic designator R31)
R31_U2 "3K" WP_0805R 248.234,50.952 r0 top (schematic designator R31)
R32_U1 "2R" WP_0805R 71.399,33.122 r0 top (schematic designator R32)
R32_U2 "2R" WP_0805R 230.988,52.807 r180 top (schematic designator R32)
R33_U1 "3K" WP_0805R 54.305,32.664 r180 top (schematic designator R33)
R33_U2 "3K" WP_0805R 248.234,53.315 r0 top (schematic designator R33)
R34_U1 "10K" WP_0805R 154.813,8.306 r270 top (schematic designator R34)
R34_U2 "10K" WP_0805R 152.679,34.214 r180 top (schematic designator R34)
R35_U1 "2R" WP_0805R 71.425,30.48 r0 top (schematic designator R35)
R35_U2 "2R" WP_0805R 231.064,55.194 r180 top (schematic designator R35)
R36_U1 "2R" WP_0805R 76.606,30.353 r0 top (schematic designator R36)
R36_U2 "2R" WP_0805R 226.365,55.626 r180 top (schematic designator R36)
R37_U1 "10K" WP_0805R 81.077,27.991 r90 top (schematic designator R37)
R37_U2 "10K" WP_0805R 221.539,57.963 r270 top (schematic designator R37)
R38_U1 "20K" WP_0805R 154.838,3.429 r270 top (schematic designator R38)
R38_U2 "20K" WP_0805R 147.625,31.953 r180 top (schematic designator R38)
R39_U1 "2R" WP_0805R 71.196,72.593 r0 top (schematic designator R39)
R39_U2 "2R" WP_0805R 231.14,69.875 r180 top (schematic designator R39)
R40_U1 "0K" WP_0805R 31.979,98.958 r0 top (schematic designator R40)
R40_U2 "0K" WP_0805R 225.476,9.855 r180 top (schematic designator R40)
R41_U1 "2R" WP_0805R 71.196,69.596 r0 top (schematic designator R41)
R41_U2 "2R" WP_0805R 231.064,72.441 r180 top (schematic designator R41)
R42_U1 "2R" WP_0805R 75.921,69.621 r0 top (schematic designator R42)
R42_U2 "2R" WP_0805R 226.466,72.542 r180 top (schematic designator R42)
R43_U1 "10K" WP_0805R 80.289,125.044 r0 top (schematic designator R43)
R43_U2 "10K" WP_0805R 174.549,121.183 r90 top (schematic designator R43)
R44_U1 "5K1" WP_0805R 85.369,122.733 r0 top (schematic designator R44)
R44_U2 "5K1" WP_0805R 172.212,123.469 r270 top (schematic designator R44)
R45_U1 "200R" WP_0805R 65.811,119.558 r180 top (schematic designator R45)
R45_U2 "200R" WP_0805R 195.555,123.165 r0 top (schematic designator R45)
R46_U1 "200R" WP_0805R 102.26,123.317 r180 top (schematic designator R46)
R46_U2 "200R" WP_0805R 195.555,120.548 r0 top (schematic designator R46)
R47_U1 "10K" WP_0805R 91.694,72.365 r90 top (schematic designator R47)
R47_U2 "10K" WP_0805R 214.528,70.637 r270 top (schematic designator R47)
R48_U1 "3K" WP_0805R 53.95,62.814 r180 top (schematic designator R48)
R48_U2 "3K" WP_0805R 248.158,80.112 r0 top (schematic designator R48)
R49_U1 "2R" WP_0805R 71.272,61.493 r0 top (schematic designator R49)
R49_U2 "2R" WP_0805R 231.013,80.315 r180 top (schematic designator R49)
R50_U1 "3K" WP_0805R 53.95,60.35 r180 top (schematic designator R50)
R50_U2 "3K" WP_0805R 248.158,82.55 r0 top (schematic designator R50)
R52_U1 "2R" WP_0805R 71.222,58.674 r0 top (schematic designator R52)
R52_U2 "2R" WP_0805R 230.937,83.109 r180 top (schematic designator R52)
R53_U1 "2R" WP_0805R 75.997,58.699 r0 top (schematic designator R53)
R53_U2 "2R" WP_0805R 226.187,83.185 r180 top (schematic designator R53)
R54_U1 "10K" WP_0805R 80.569,56.388 r90 top (schematic designator R54)
R54_U2 "10K" WP_0805R 221.437,85.573 r270 top (schematic designator R54)
R55_U1 "3K" WP_0805R 56.286,119.304 r180 top (schematic designator R55)
R55_U2 "3K" WP_0805R 211.15,120.65 r90 top (schematic designator R55)
R56_U1 "10K" WP_0805R 87.909,118.186 r0 top (schematic designator R56)
R56_U2 "10K" WP_0805R 188.849,120.244 r90 top (schematic designator R56)
R57_U1 "5K1" WP_0805R 92.456,120.548 r0 top (schematic designator R57)
R57_U2 "5K1" WP_0805R 191.16,122.657 r270 top (schematic designator R57)
R58_U1 "3K" WP_0805R 53.924,117.018 r0 top (schematic designator R58)
R58_U2 "3K" WP_0805R 213.69,120.625 r90 top (schematic designator R58)
R59_U1 "2R" WP_0805R 71.069,102.26 r0 top (schematic designator R59)
R59_U2 "2R" WP_0805R 230.962,98.527 r180 top (schematic designator R59)
R60_U1 "2R" WP_0805R 71.069,99.974 r0 top (schematic designator R60)
R60_U2 "2R" WP_0805R 230.962,101.524 r180 top (schematic designator R60)
R61_U1 "2R" WP_0805R 77.546,99.441 r0 top (schematic designator R61)
R61_U2 "2R" WP_0805R 226.517,101.549 r180 top (schematic designator R61)
R62_U1 "10K" WP_0805R 90.17,100.787 r90 top (schematic designator R62)
R62_U2 "10K" WP_0805R 213.944,98.654 r270 top (schematic designator R62)
R63_U1 "3K" WP_0805R 53.772,94.285 r180 top (schematic designator R63)
R63_U2 "3K" WP_0805R 247.929,107.391 r0 top (schematic designator R63)
R64_U1 "2R" WP_0805R 70.891,89.891 r0 top (schematic designator R64)
R64_U2 "2R" WP_0805R 231.038,108.433 r180 top (schematic designator R64)
R65_U1 "3K" WP_0805R 53.772,91.821 r180 top (schematic designator R65)
R65_U2 "3K" WP_0805R 247.955,109.703 r0 top (schematic designator R65)
R66_U1 "2R" WP_0805R 70.917,87.046 r0 top (schematic designator R66)
R66_U2 "2R" WP_0805R 231.064,110.846 r180 top (schematic designator R66)
R67_U1 "2R" WP_0805R 75.54,87.046 r0 top (schematic designator R67)
R67_U2 "2R" WP_0805R 226.365,111.277 r180 top (schematic designator R67)
R68_U1 "10K" WP_0805R 80.315,84.811 r90 top (schematic designator R68)
R68_U2 "10K" WP_0805R 221.615,113.64 r270 top (schematic designator R68)
R69_U1 "10K" WP_0805R 64.287,115.087 r180 top (schematic designator R69)
R69_U2 "10K" WP_0805R 143.789,131.877 r180 top (schematic designator R69)
R70_U1 "5K1" WP_0805R 61.9,112.801 r0 top (schematic designator R70)
R70_U2 "5K1" WP_0805R 141.326,125.374 r270 top (schematic designator R70)
R71_U1 "3K" WP_0805R 102.26,118.11 r90 top (schematic designator R71)
R71_U2 "3K" WP_0805R 152.298,106.553 r270 top (schematic designator R71)
R72_U1 "20K" WP_0805R 70.917,111.887 r180 top (schematic designator R72)
R72_U2 "20K" WP_0805R 143.916,117.831 r90 top (schematic designator R72)
R73_U1 "10K" WP_0805R 84.353,109.779 r180 top (schematic designator R73)
R73_U2 "10K" WP_0805R 143.84,113.386 r90 top (schematic designator R73)
R74_U1 "10K/1%" WP_0805R 112.522,112.217 r270 top (schematic designator R74)
R74_U2 "10K/1%" WP_0805R 147.269,89.052 r0 top (schematic designator R74)
R75_U1 "10K/1%" WP_0805R 110.185,112.217 r270 top (schematic designator R75)
R75_U2 "10K/1%" WP_0805R 147.32,91.44 r0 top (schematic designator R75)
R76_U1 "1K/1%" WP_0805R 107.848,109.83 r90 top (schematic designator R76)
R76_U2 "1K/1%" WP_0805R 149.555,93.599 r90 top (schematic designator R76)
R77_U1 "20K" WP_0805R 77.775,112.395 r90 top (schematic designator R77)
R77_U2 "20K" WP_0805R 146.863,117.729 r90 top (schematic designator R77)
R78_U1 "10K" WP_0805R 84.328,112.42 r180 top (schematic designator R78)
R78_U2 "10K" WP_0805R 146.888,113.259 r90 top (schematic designator R78)
R79 "0R" WP_JS2L 135.941,15.138 r180 top
R80 "0R" WP_JS2L 165.532,40.843 r90 top
U1_U1 "MCP604T-I/SL" WP_SOIC14 122.403,119.939 r0 top (schematic designator U1)
U1_U2 "MCP604T-I/SL" WP_SOIC14 158.267,120.523 r0 top (schematic designator U1)
U2_U1 "AS1117-2V5" WP_SOT223 135.255,120.218 r270 top (schematic designator U2)
U2_U2 "AS1117-2V5" WP_SOT223 170.993,120.548 r270 top (schematic designator U2)
U3_U1 "TPS54531DDAR" WP_SOIC8P 10.185,101.752 r0 top (schematic designator U3)
U3_U2 "TPS54531DDAR" WP_SOIC8P 243.764,12.141 r180 top (schematic designator U3)
U4_U1 "OPA2188AIDR" WP_SOIC8 103.759,130.023 r0 top (schematic designator U4)
U4_U2 "OPA2188AIDR" WP_SOIC8 161.468,126.086 r180 top (schematic designator U4)
U5_U1 "ACS712ELCTR-05B-T" WP_SOIC8 110.795,4.242 r180 top (schematic designator U5)
U5_U2 "ACS712ELCTR-05B-T" WP_SOIC8 153.467,87.782 r90 top (schematic designator U5)
U6_U1 "IR2213S" WP_SOIC16L 68.402,31.166 r180 top (schematic designator U6)
U6_U2 "IR2213S" WP_SOIC16L 233.705,54.254 r0 top (schematic designator U6)
U7_U1 "ACS712ELCTR-05B-T" WP_SOIC8 109.83,33.503 r0 top (schematic designator U7)
U7_U2 "ACS712ELCTR-05B-T" WP_SOIC8 194.894,54.051 r180 top (schematic designator U7)
U8_U1 "OPA2188AIDR" WP_SOIC8 79.858,121.361 r0 top (schematic designator U8)
U8_U2 "OPA2188AIDR" WP_SOIC8 179.299,124.714 r0 top (schematic designator U8)
U9_U1 "IR2213S" WP_SOIC16L 68.301,58.979 r180 top (schematic designator U9)
U9_U2 "IR2213S" WP_SOIC16L 233.782,82.753 r0 top (schematic designator U9)
U10_U1 "ACS712ELCTR-05B-T" WP_SOIC8 109.525,62.408 r0 top (schematic designator U10)
U10_U2 "ACS712ELCTR-05B-T" WP_SOIC8 194.869,81.026 r180 top (schematic designator U10)
U11_U1 "IR2213S" WP_SOIC16L 68.199,89.941 r180 top (schematic designator U11)
U11_U2 "IR2213S" WP_SOIC16L 233.782,111.252 r0 top (schematic designator U11)
U12_U1 "ACS712ELCTR-05B-T" WP_SOIC8 109.347,90.83 r0 top (schematic designator U12)
U12_U2 "ACS712ELCTR-05B-T" WP_SOIC8 194.793,108.56 r180 top (schematic designator U12)
U13_U1 "OPA2188AIDR" WP_SOIC8 67.843,118.466 r0 top (schematic designator U13)
U13_U2 "OPA2188AIDR" WP_SOIC8 148.057,128.067 r270 top (schematic designator U13)
U14_U1 "ACPL-C87B-500E" WP_SOIC8L 99.949,109.372 r180 top (schematic designator U14)
U14_U2 "ACPL-C87B-500E" WP_SOIC8L 144.831,98.908 r90 top (schematic designator U14)
U15_U1 "TLP127" WP_SOP4 64.694,122.301 r180 top (schematic designator U15)
U15_U2 "TLP127" WP_SOP4 200.076,123.165 r0 top (schematic designator U15)
V1_U1 "BAV99" WP_SOT23B 103.886,112.116 r180 top (schematic designator V1)
V1_U2 "BAV99" WP_SOT23B 144.78,95.529 r180 top (schematic designator V1)

## Footprints (in the part's own frame and the unit in brackets; to place one, negate y for a bottom-side part, rotate by r counter-clockwise, add the part's x,y. Pads: shape width x height; smd on the part's side, far side on the other; paste and mask are expansions set on the pad)
JY_TO263-7 [mm]
  rect 0.8x4.5 smd: 1(0,0) 2(1.27,0) 3(2.54,0) 5(5.08,0) 6(6.35,0) 7(7.62,0)
  rect 10.5x11 smd: 4(3.81,10.058)
  silkscreen extent -1.83,-3.17 9.45,15.9
WP_0805_LED [mil]
  rect 50x50 smd: 1(0,0) 2(91,0)
  silkscreen extent -33,-37 138,36
WP_0805C [mil]
  rect 39.37x50 smd: 1(1,-1) 2(95,-1)
  silkscreen extent -30,-38 125,35
WP_0805R [mm]
  rect 1x1.27 smd: 1(0,0) 2(2.388,0)
  silkscreen extent -0.79,-0.94 3.17,0.91
WP_1206CC [mil]
  rect 52.13x60 smd: 1(0,0) 2(135,0)
  silkscreen extent -36,-43 171,42
WP_1210CC [mil]
  rect 60x100 smd: 1(0,0) 2(135,0)
  silkscreen extent -44,-63 179,63
WP_1812D [mil]
  rect 60x125 smd: 1(0,0) 2(185,0)
  silkscreen extent -46,-85 232,85
WP_2420 [mil]
  rect 120x196.85 smd: 1(0,0) 2(248,0)
  silkscreen extent -72,-109 319,108
WP_CRM222-020 [mil]
  oval 40x60 hole 30: 1(0,0) 2(-75,0) 3(-150,0) 4(-225,0) 5(-300,0) 6(-375,0) 7(-450,0) 8(-525,0) 9(-600,0) 10(-675,0) 11(-37.5,75) 12(-112.5,75) 13(-187.5,75) 14(-262.5,75) 15(-337.5,75) 16(-412.5,75) 17(-487.5,75) 18(-562.5,75) 19(-637.5,75) 20(-712.5,75)
  round 106.3 hole 106.3: ""(-1027.51,37.5) ""(315.01,37.5)
  silkscreen extent -1112,-62 400,138
WP_CRM222-030 [mil]
  oval 40x60 hole 30: 1(0,0) 2(-75,0) 3(-150,0) 4(-225,0) 5(-300,0) 6(-375,0) 7(-450,0) 8(-525,0) 9(-600,0) 10(-675,0) 11(-750,0) 12(-825,0) 13(-900,0) 14(-975,0) 15(-1050,0) 16(-37.48,75) 17(-112.48,75) 18(-187.48,75) 19(-262.48,75) 20(-337.48,75) 21(-412.48,75) 22(-487.48,75) 23(-562.48,75) 24(-637.48,75) 25(-712.48,75) 26(-787.48,75) 27(-862.48,75) 28(-937.48,75) 29(-1012.48,75) 30(-1087.48,75)
  round 106.3 hole 106.3: ""(-1402.48,37.5) ""(314.04,37.5)
  silkscreen extent -1489,-63 401,138
WP_JS2L [mm]
  rect 3x5 smd: 1(-0.102,-0.025) 2(3.581,-0.025)
  silkscreen extent -1.78,-2.69 5.26,2.64
WP_LBS6*6 [mm]
  rect 2x3.5 smd: 1(0,0) 2(5.5,0)
  silkscreen extent -1.19,-3 6.71,3
WP_LSIP2 [mil]
  rect 100x100 hole 60: 1(0,0)
  round 100 hole 60: 2(150,0)
  silkscreen extent -106,-136 252,142
WP_SIP2 [mil]
  rect 70x70 hole 40: 1(0,0)
  round 70 hole 40: 2(100,0)
  silkscreen extent -50,-120 160,100
WP_SMA_DO214AC [mm]
  rect 2.35x1.55 smd: 1(0,0) 2(4.3,0)
  silkscreen extent -0.65,-1.5 5.73,1.5, body extent -0.45,-1.3 4.75,1.3, height 2.64
WP_SOD-323 [mm]
  rect 0.9x0.5 smd: 1(-0.025,0.025) 2(2.575,0.025)
  silkscreen extent 0.37,-0.65 2.76,0.7, body extent -0.08,-0.6 2.62,0.65, height 1.1
WP_SOIC8 [mm]
  oval 1.5x0.5 smd: 1(-1.473,-0.66) 2(-1.473,-1.93) 3(-1.473,-3.2) 4(-1.473,-4.47) 5(4.674,-4.47) 6(4.674,-3.2) 7(4.674,-1.93) 8(4.674,-0.66)
  silkscreen extent -0.03,-5.08 3.23,0.03
WP_SOIC8L [mm]
  oval 2x0.6 smd: 1(0,0) 2(0,-1.27) 3(0,-2.54) 4(0,-3.81) 5(11.506,-3.81) 6(11.506,-2.54) 7(11.506,-1.27) 8(11.506,0)
  silkscreen extent 1.45,-4.42 10.06,0.69
WP_SOIC8P [mil]
  oval 59.06x19.68 smd: 1(-2,1) 2(-2,-49) 3(-2,-99) 4(-2,-149) 5(240,-149) 6(240,-99) 7(240,-49) 8(240,1)
  rect 100x120 smd: 9(119,-73)
  silkscreen extent 55,-173 183,28
WP_SOIC14 [mm]
  oval 1.5x0.5 smd: 1(-1.219,-0.889) 2(-1.219,-2.159) 3(-1.219,-3.429) 4(-1.219,-4.699) 5(-1.219,-5.969) 6(-1.219,-7.239) 7(-1.219,-8.509) 8(4.953,-8.484) 9(4.928,-7.214) 10(4.928,-5.994) 11(4.928,-4.674) 12(4.928,-3.404) 13(4.928,-2.159) 14(4.928,-0.864)
  silkscreen extent 0.03,-9.12 3.68,0.05
WP_SOIC16L [mm]
  rect 2x0.4 smd: 1(0,0)
  oval 2x0.4 smd: 2(0,-1.27) 3(0,-2.54) 4(0,-3.81) 5(0,-5.08) 6(0,-6.35) 7(0,-7.62) 8(0,-8.89) 9(10.65,-8.89) 10(10.65,-7.62) 11(10.65,-6.35) 12(10.65,-5.08) 13(10.65,-3.81) 14(10.65,-2.54) 15(10.65,-1.27) 16(10.65,0)
  silkscreen extent 1.84,-9.53 8.81,0.64
WP_SOP4 [mil]
  rect 80x30 smd: 1(11,1)
  oval 80x30 smd: 3(11,-99) 4(293,-99) 6(293,1)
  silkscreen extent 63,-140 241,51
WP_SOT23B [mil]
  rect 30x40 smd: 1(0,0) 2(74,0) 3(37,76)
  silkscreen extent -19,-24 93,100
WP_SOT223 [mm]
  rect 1x1.8 smd: 1(0.864,-4.47) 2(3.175,-4.47) 3(5.436,-4.496)
  rect 4x2.4 smd: 4(3.15,1.473)
  silkscreen extent 0,-3.35 6.27,0
WP_TO263-3 [mil]
  rect 60x150 smd: 1(0,0) 3(200,0)
  rect 400x400 smd: 2(101,403)
  silkscreen extent -134,144 338,617